# Altium PCB BSafePCB.PcbDoc
Units mil, origin at the board's own origin, x right, y up, seen from the top; angles counter-clockwise.
Board outline 3444 x 2163 mil, 2 copper layers (Top Layer, Bottom Layer); 47 components, 47 nets, 232 pads, 42 vias.
Unrouted connection lines stored in the file: 6.
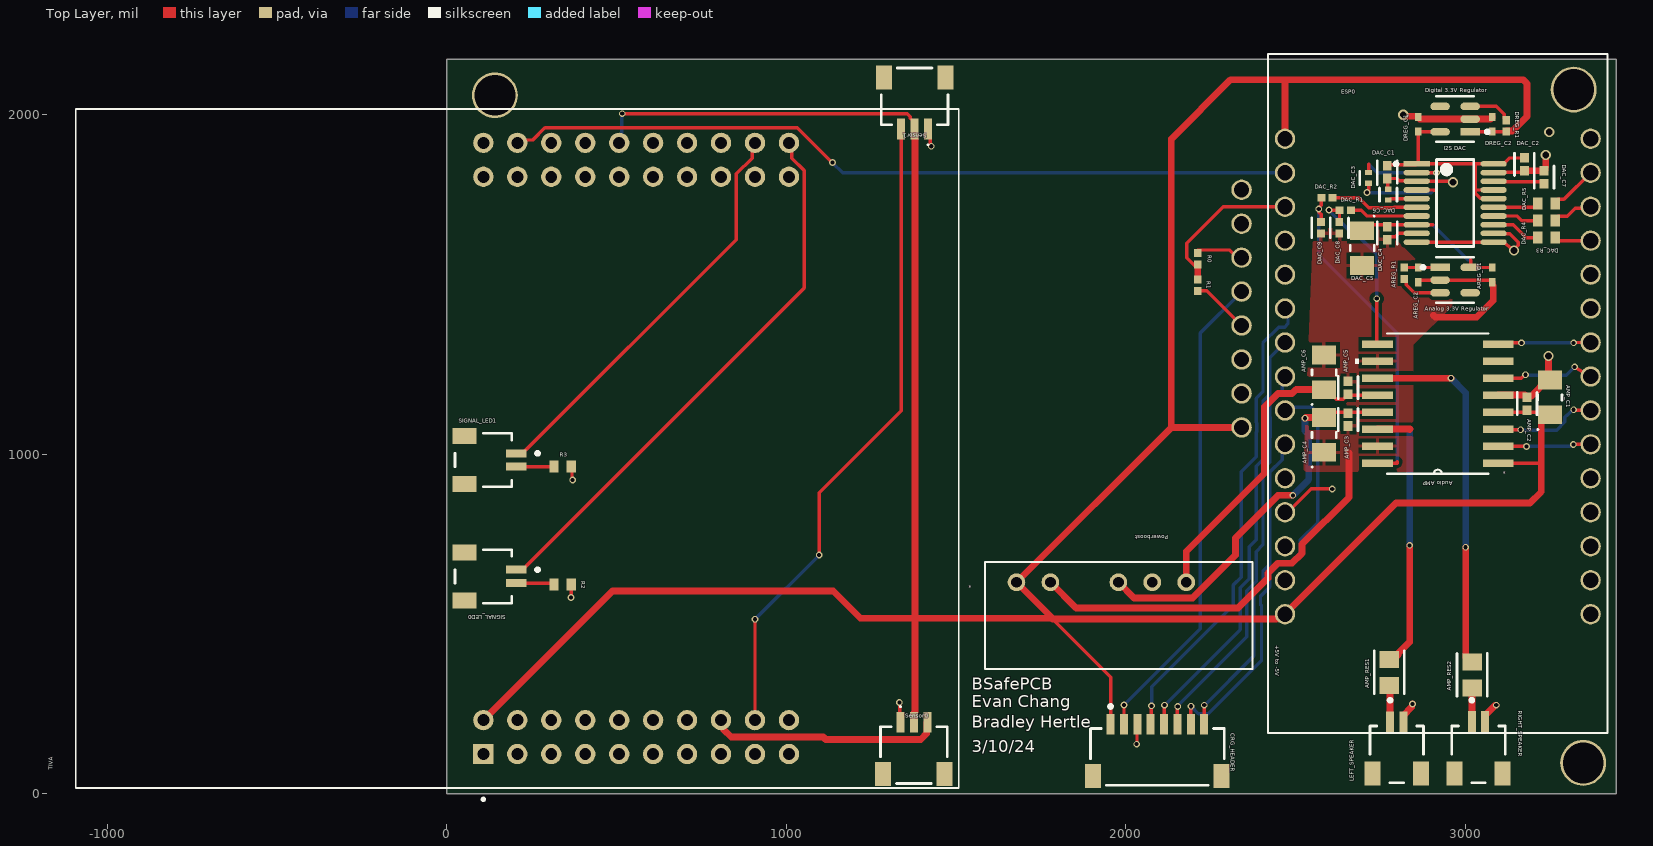
[diagram p0: Top Layer view]
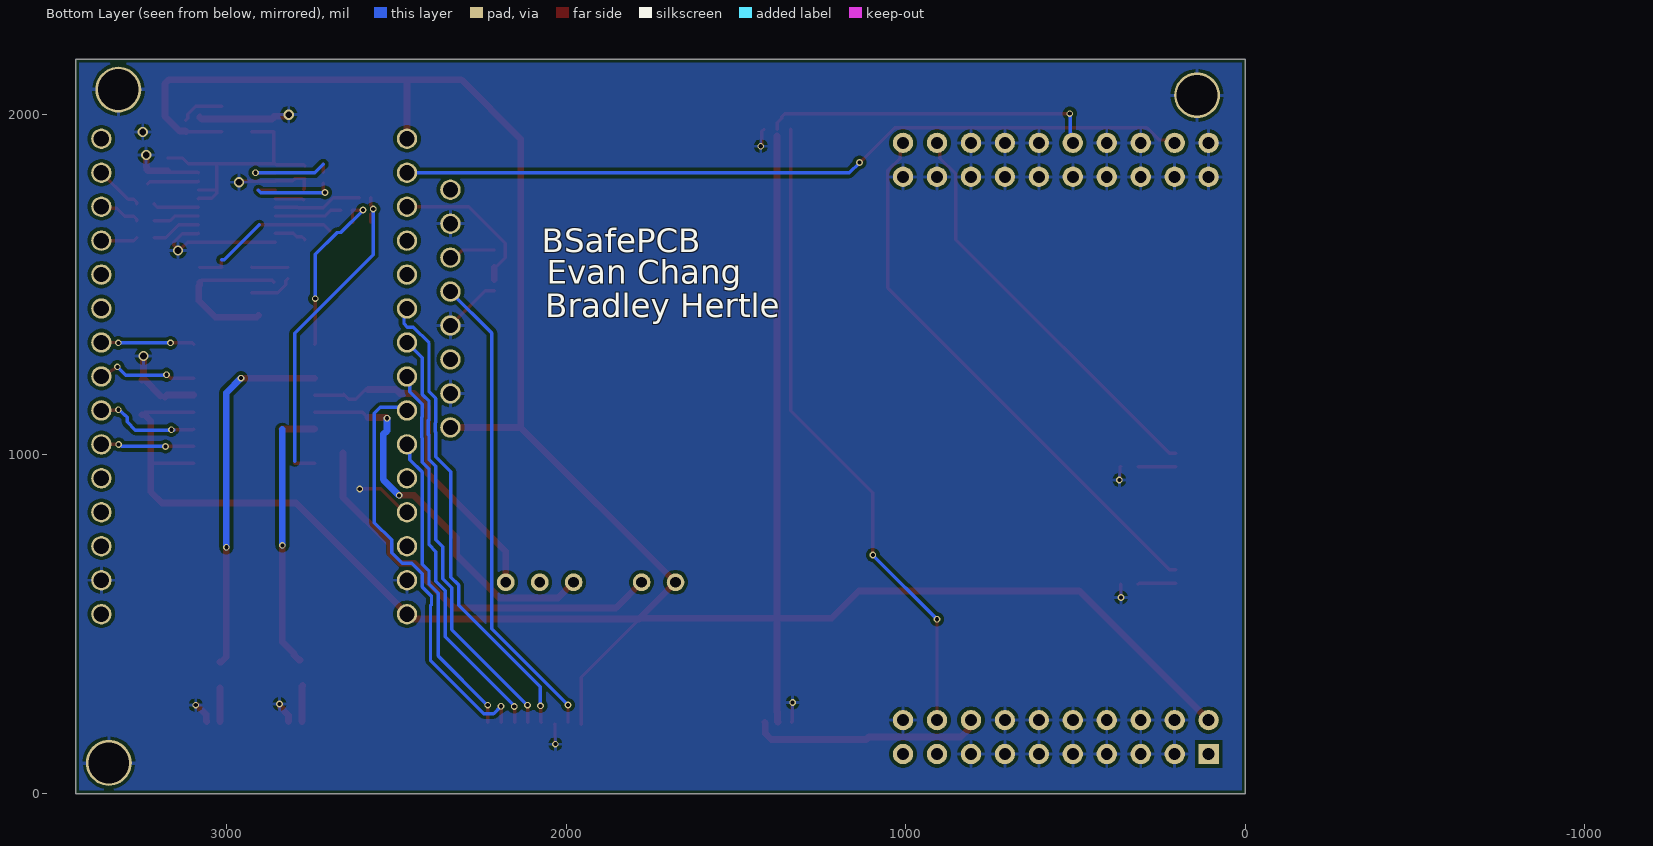
[diagram p1: Bottom Layer view, seen from below]
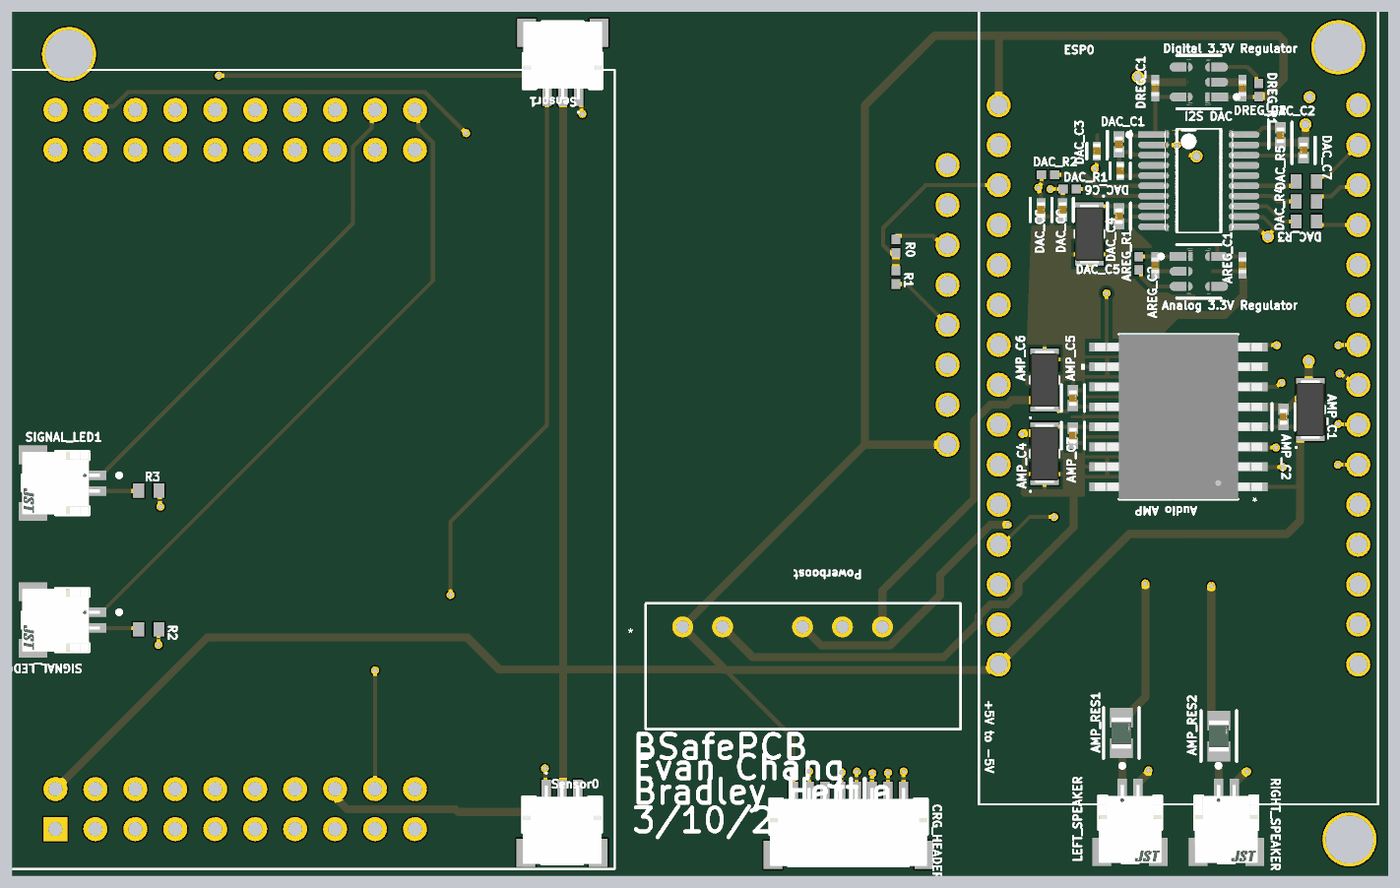
[diagram p2: 3D render of the assembled board from above, using the file's embedded part models]

## Layer stack, top to bottom
Top Solder: solder mask 0.4, Solder Resist, Dk 3.5
Top Layer: signal copper 1.4
Dielectric 1: dielectric 12.6, FR-4, Dk 4.8
Bottom Layer: signal copper 1.4
Bottom Solder: solder mask 0.4, Solder Resist, Dk 3.5

## Board outline
0,0 3444,0 3444,2163 0,2163

## Design rules (kind name [scope] priority, off if disabled: settings)
Clearance Clearance_3 [All] p1: gap=10 ignorepadtopadclearanceinfootprint=TRUE
Clearance [All] p2: gap=10 ignorepadtopadclearanceinfootprint=TRUE
PolygonConnect [All] p1: connectstyle=Relief reliefconductorwidth=10 reliefentries=4 polygonreliefangle="90 Angle" airgapwidth=10
RoutingVias [All] p1: holewidth=12 width=20 viastyle="Through Hole" minholewidth=12 minwidth=20 maxholewidth=20 maxwidth=30
SolderMaskExpansion [All] p1: expansion=4 istentingtop=FALSE
Width [All] p1: maxlimit=20 minlimit=10 preferedwidth=10
30 further rules are at their usual default settings.

## Classes and differential pairs
component class PGA: "+5V to -5V" AMP_C1 AMP_C2 AMP_C3 AMP_C4 AMP_C5 AMP_C6 AMP_RES1 AMP_RES2 "Audio AMP" LEFT_SPEAKER RIGHT_SPEAKER z
component class PCM: "Analog 3.3V Regulator" AREG_C1 AREG_C2 AREG_R1 DAC_C1 DAC_C2 DAC_C3 DAC_C4 DAC_C5 DAC_C6 DAC_C7 DAC_C8 DAC_C9 DAC_R1 DAC_R2 DAC_R3 DAC_R4 DAC_R5 "Digital 3.3V Regulator" DREG_C1 DREG_C2 DREG_R1 "I2S DAC" z
component class MAIN_SCH: CRG_HEADER ESP0 Powerboost R0 R1 R2 R3 Sensor0 Sensor1 SIGNAL_LED0 SIGNAL_LED1 TIVA z

## Components (designator, comment, footprint, x,y, rotation, side; value= is the part's Value field where it differs from the comment)
"+5V to -5V" "TMH0505D" "TMH DUAL_TRP" 1678,623 r0 top
AMP_C1 "TAJA106K016RNJ" CAPMP3217X18-T_V 3249,1167.18 r90 top locked value=10µF
AMP_C2 "CL05A104KA5NNNC" FP-CL278-IPC_A 3182,1148.84 r90 top locked value=100nF
AMP_C3 "CL05A104KA5NNNC" FP-CL278-IPC_A 2655,1102 r90 top locked value=100nF
AMP_C4 "TAJA106K016RNJ" CAPMP3217X18-T_V 2584,1056.82 r90 top locked value=10µF
AMP_C5 "CL05A104KA5NNNC" FP-CL278-IPC_A 2655,1195.84 r90 top locked value=100nF
AMP_C6 "TAJA106K016RNJ" CAPMP3217X18-T_V 2584,1241.18 r90 top locked value=10µF
AMP_RES1 "ESR10EZPJ560" FP-ESR10-IPC_A 2776,357.46 r270 top value=56
AMP_RES2 "ESR10EZPJ560" FP-ESR10-IPC_A 3020,350 r270 top value=56
"Analog 3.3V Regulator" "MIC5504-3.3YM5-TR" FP-SOT23-5LD-PL-1-IPC_B 2970,1512.87 r0 top locked
AREG_C1 "1uF 0402 Ceramic" CAP_CL05_SAM 3079,1528.11 r90 top locked value=1µF
AREG_C2 "1uF 0402 Ceramic" CAP_CL05_SAM 2861,1528.11 r90 top locked value=1µF
AREG_R1 "RC0402FR-07220KL" RESC1005X40X25NL05T10 2820,1533.14 r90 top locked
"Audio AMP" "PGA2311U" DW16 2919,1149 r180 top locked
CRG_HEADER "SM08B-SRSS-TB(LF)(SN)" JST-SM08B-SRSS-TB_V 2092.94,108.54 r0 top
DAC_C1 "CL05A104KA5NNNC" FP-CL278-IPC_A 2770,1830.87 r90 top locked value=100nF
DAC_C2 "CL05A104KA5NNNC" FP-CL278-IPC_A 3174,1853.71 r90 top locked value=100nF
DAC_C3 "GRM155R61A225KE01J" FP-GRM155-0_05-MFG 2715,1814.12 r270 top locked value=2.2µF
DAC_C4 "CL05A104KA5NNNC" FP-CL278-IPC_A 2770,1651.03 r270 top locked value=100nF
DAC_C5 "TAJA106K016RNJ" CAPMP3217X18-T_V 2696,1606.69 r270 top locked value=10µF
DAC_C6 "GRM155R61A225KE01J" FP-GRM155-0_05-MFG 2773,1764.62 r90 top locked value=2.2µF
DAC_C7 "CL05A104KA5NNNC" FP-CL278-IPC_A 3232,1815.87 r270 top locked value=100nF
DAC_C8 "CL05B222JB5NNNC" FP-CL316-IPC_B 2629,1666.87 r270 top locked value=2.2nF
DAC_C9 "CL05B222JB5NNNC" FP-CL316-IPC_B 2575,1666.87 r90 top locked value=2.2nF
DAC_R1 "RC0402FR-07470RL" RESC1005X40X25NL05T10 2646.73,1718.87 r180 top locked
DAC_R2 "RC0402FR-07470RL" RESC1005X40X25NL05T10 2592.73,1754.87 r180 top locked
DAC_R3 "RK73B1JTTD221J" RESC1608X55X30LL20T10 3239,1637.87 r180 top locked value=220
DAC_R4 "RK73B1JTTD221J" RESC1608X55X30LL20T10 3239,1687.87 r180 top locked value=220
DAC_R5 "RK73B1JTTD221J" RESC1608X55X30LL20T10 3239,1737.87 r180 top locked value=220
"Digital 3.3V Regulator" "MIC5504-3.3YM5-TR" FP-SOT23-5LD-PL-1-IPC_B 2970,1986.87 r180 top locked
DREG_C1 "1uF 0402 Ceramic" CAP_CL05_SAM 2861,1971.64 r270 top locked value=1µF
DREG_C2 "1uF 0402 Ceramic" CAP_CL05_SAM 3079,1971.64 r270 top locked value=1µF
DREG_R1 "RC0402FR-07220KL" RESC1005X40X25NL05T10 3120,1966.87 r270 top locked
ESP0 "ESP-32-BB" ESP-32-BB-Footprint-1 2469,1929 r0 top locked
"I2S DAC" "PCM5102APWR" FP-PW0020A-IPC_A 2970,1739.87 r0 top locked
LEFT_SPEAKER "SM02B-SRSS-TB(LF)(SN)" FP-SM02B-SRSS-TB_LF_SN-0 2798,116 r0 top
Powerboost "Powerboost 500c" "Powerboost 500c-Footprint-1" 2341,1779 r270 top locked
R0 "RC0402FR-07220KL" RESC1005X40X25NL05T10 2212,1576 r270 top value=220k
R1 "RC0402FR-0747KL" RESC1005X40X25NL05T10 2212,1498 r270 top value=47k
R2 "RK73B1JTTD221J" RESC1608X55X30LL20T10 341.59,617 r0 top value=220
R3 "RK73B1JTTD221J" RESC1608X55X30LL20T10 341.59,964 r0 top value=220
RIGHT_SPEAKER "SM02B-SRSS-TB(LF)(SN)" FP-SM02B-SRSS-TB_LF_SN-0 3038.87,116.1 r0 top
Sensor0 "SM03B-SRSS-TB(LF)(SN)" JST-SM03B-SRSS-TB_V 1376,114 r0 top
Sensor1 "SM03B-SRSS-TB(LF)(SN)" JST-SM03B-SRSS-TB_V 1378,2054 r180 top
SIGNAL_LED0 "SM02B-SRSS-TB(LF)(SN)" FP-SM02B-SRSS-TB_LF_SN-0 108.1,640.13 r270 top
SIGNAL_LED1 "SM02B-SRSS-TB(LF)(SN)" FP-SM02B-SRSS-TB_LF_SN-0 108.1,982.87 r270 top
TIVA "EK-TM4C123GXL" EK-TM4C123GXL-Footprint-1 108,117 r90 top locked

## Footprints (in the part's own frame and the unit in brackets; to place one, negate y for a bottom-side part, rotate by r counter-clockwise, add the part's x,y. Pads: shape width x height; smd on the part's side, far side on the other; paste and mask are expansions set on the pad)
CAP_CL05_SAM [mm]
  rect 0.606x0.5 smd paste+0 mask+0: 1(-0.553,0) 2(0.553,0)
  body extent -0.5,-0.25 0.5,0.25, height 0.55
CAPMP3217X18-T_V [mm] "Molded Capacitor, 2-Leads, Body 3.40x1.8mm"
  rect 1.4x1.8 smd: 1(-1.3,0) 2(1.3,0)
  silkscreen extent -2.45,-0.9 0.2,0.95, body extent -1.92,-0.9 1.92,0.9, height 1.8
DW16 [mil]
  rect 91x22 smd paste+0 mask+0: 1(-178,175) 2(-178,125) 3(-178,75) 4(-178,25) 5(-178,-25) 6(-178,-75) 7(-178,-125) 8(-178,-175) 9(178,-175) 10(178,-125) 11(178,-75) 12(178,-25) 13(178,25) 14(178,75) 15(178,125) 16(178,175)
  silkscreen extent -150,-207 244,207, body extent -209,-206 209,206, height 104
EK-TM4C123GXL-Footprint-1 [mm]
  rect 1.52x1.52 hole 0.89: J1_1(0,0)
  round 1.52 hole 0.89: J1_2(0,-2.54) J1_3(0,-5.08) J1_4(0,-7.62) J1_5(0,-10.16) J1_6(0,-12.7) J1_7(0,-15.24) J1_8(0,-17.78) J1_9(0,-20.32) J1_10(0,-22.86) J2_1(45.72,0) J2_2(45.72,-2.54) J2_3(45.72,-5.08) J2_4(45.72,-7.62) J2_5(45.72,-10.16) J2_6(45.72,-12.7) J2_7(45.72,-15.24) J2_8(45.72,-17.78) J2_9(45.72,-20.32) J2_10(45.72,-22.86) J3_1(2.54,0) J3_2(2.54,-2.54) J3_3(2.54,-5.08) J3_4(2.54,-7.62) J3_5(2.54,-10.16) J3_6(2.54,-12.7) J3_7(2.54,-15.24) J3_8(2.54,-17.78) J3_9(2.54,-20.32) J3_10(2.54,-22.86) J4_1(43.18,0) J4_2(43.18,-2.54) J4_3(43.18,-5.08) J4_4(43.18,-7.62) J4_5(43.18,-10.16) J4_6(43.18,-12.7) J4_7(43.18,-15.24) J4_8(43.18,-17.78) J4_9(43.18,-20.32) J4_10(43.18,-22.86)
  silkscreen extent -3.49,-35.56 48.26,30.48, body extent -5.97,-35.56 52.45,30.48, height 25.4
ESP-32-BB-Footprint-1 [mil]
  round 60 hole 45: 1(0,0) 2(0,-100) 3(0,-200) 4(0,-300) 5(0,-400) 6(0,-500) 7(0,-600) 8(0,-700) 9(0,-800) 10(0,-900) 11(0,-1000) 12(0,-1100) 13(0,-1200) 14(0,-1300) 15(0,-1400) 16(900,-1400) 17(900,-1300) 18(900,-1200) 19(900,-1100) 20(900,-1000) 21(900,-900) 22(900,-800) 23(900,-700) 24(900,-600) 25(900,-500) 26(900,-400) 27(900,-300) 28(900,-200) 29(900,-100) 30(900,0)
  silkscreen extent -50,-1750 950,250, body extent -50,-1750 950,250, height 488
FP-CL278-IPC_A [mil]
  rect 28.16x26.48 smd paste+0 mask+0: 1(-18.84,0) 2(18.84,0)
  silkscreen extent -33,-29 33,29, body extent -41,-21 41,21, height 10
FP-CL316-IPC_B [mil]
  rect 24.23x22.54 smd paste+0 mask+0: 1(-16.87,0) 2(16.87,0)
  silkscreen extent -29,-27 29,27, body extent -35,-17 35,17, height 10
FP-ESR10-IPC_A [mil]
  rect 49.53x57.56 smd paste+0 mask+0: 1(-38.46,0) 2(38.46,0)
  silkscreen extent -63,-45 63,45, body extent -83,-48 83,48, height 10
FP-GRM155-0_05-MFG [mm]
  rect 0.4x0.5 smd paste+0 mask+0: 1(-0.4,0) 2(0.4,0)
  silkscreen extent -0.5,-0.65 0.5,0.65, body extent -0.7,-0.38 0.7,0.38, height 0.25
FP-PW0020A-IPC_A [mm]
  rect 1.955x0.421 smd paste+0 mask+0: 1(-2.875,2.925)
  rrect100% 1.955x0.421 smd paste+0 mask+0: 2(-2.875,2.275) 3(-2.875,1.625) 4(-2.875,0.975) 5(-2.875,0.325) 6(-2.875,-0.325) 7(-2.875,-0.975) 8(-2.875,-1.625) 9(-2.875,-2.275) 10(-2.875,-2.925) 11(2.875,-2.925) 12(2.875,-2.275) 13(2.875,-1.625) 14(2.875,-0.975) 15(2.875,-0.325) 16(2.875,0.325) 17(2.875,0.975) 18(2.875,1.625) 19(2.875,2.275) 20(2.875,2.925)
  silkscreen extent -4.55,-3.25 1.4,3.25, body extent -4.35,-3.75 4.35,3.75, height 0.25
FP-SM02B-SRSS-TB_LF_SN-0 [mm]
  rect 0.6x1.55 smd paste+0 mask+0: 1(-0.5,2.45) 2(0.5,2.45)
  rect 1.2x1.8 smd paste+0 mask+0: 3(-1.8,-1.425) 4(1.8,-1.425)
  silkscreen extent -2,-2.13 2,4.17, body extent -2.5,-2.42 2.5,3.32, height 0.25
FP-SOT23-5LD-PL-1-IPC_B [mm]
  rect 1.456x0.57 smd paste+0 mask+0: 1(-1.125,0.95)
  rrect100% 1.456x0.57 smd paste+0 mask+0: 2(-1.125,0) 3(-1.125,-0.95) 4(1.125,-0.95) 5(1.125,0.95)
  silkscreen extent -2.53,-1.7 1.4,1.7, body extent -2.1,-1.7 2.1,1.7, height 0.25
JST-SM03B-SRSS-TB_V [mm] "SMD, 3-Leads, Body 5x4.25mm, Pitch 1mm"
  rect 0.6x1.55 smd: 1(-1,2.45) 2(0,2.45) 3(1,2.45)
  rect 1.2x1.8 smd: MP1(-2.3,-1.425) MP2(2.3,-1.425)
  silkscreen extent -2.5,-2.13 2.5,3.67, body extent -2.5,-2.12 2.5,2.83, height 3.25
JST-SM08B-SRSS-TB_V [mm] "SMD, 8-Leads, Body 10x4.25mm, Pitch 1mm"
  rect 0.6x1.55 smd: 1(-3.5,2.45) 2(-2.5,2.45) 3(-1.5,2.45) 4(-0.5,2.45) 5(0.5,2.45) 6(1.5,2.45) 7(2.5,2.45) 8(3.5,2.45)
  rect 1.2x1.8 smd: MP1(-4.8,-1.425) MP2(4.8,-1.425)
  silkscreen extent -5,-2.12 5,3.9, body extent -5,-2.12 5,2.83, height 2.96
"Powerboost 500c-Footprint-1" [mil]
  round 60 hole 45: 1(0,0) 2(100,0) 3(200,0) 4(300,0) 5(400,0) 6(500,0) 7(600,0) 8(700,0)
  body extent -400,-800 1000,50, height 550
RESC1005X40X25NL05T10 [mm] "Chip Resistor, 2-Leads, Body 1.00x0.50mm, IPC Medium Density"
  rect 0.6x0.55 smd: 1(-0.425,0) 2(0.425,0)
  body extent -0.53,-0.27 0.53,0.28, height 0.4
RESC1608X55X30LL20T10 [mm] "Chip Resistor, 2-Leads, Body 1.60x0.80mm, IPC High Density"
  rect 0.7x0.9 smd: 1(-0.65,0) 2(0.65,0)
  body extent -0.9,-0.5 0.9,0.5, height 0.55
"TMH DUAL_TRP" [mil]
  round 52 / inner round 60 / far side round 52 hole 32 paste-99999 mask+0: 1(0,0) 2(100,0) 4(300,0) 5(400,0) 6(500,0)
  silkscreen extent -92,-256 696,59, body extent -95,-260 700,60, height 400

## Part data
"+5V to -5V": library part CMP-019-00049-2, "DC-DC Regulated Power Supply Module, 2 Output, 2W, Hybrid", Max Operating Temperature=85°C, Min Operating Temperature=-40°C, RoHS Compliant=Yes
AMP_C1 AMP_C4 AMP_C6 DAC_C5: library part CMP-001-00041-7, "Standard Tantalum, 10 uF, +/- 10%, 16 V, -55 to 125 degC, 1206 (3216 Metric), RoHS, Tape and Reel", Capacitor Type=Tantalum, Case/Package=1206, Manufacturer=AVX, Max Operating Temperature=125°C, Min Operating Temperature=-55°C, Package Description="2-Pin Surface Mount Device, Body 3.2 x 1.65 mm", Package Quantity=1, Package Reference=CAPMP3217X18-T, Tolerance=10%, Voltage Rating=16V, Datasheet URL=http://datasheets.avx.com/TAJ.pdf, Datasheet Version=Feb-16, ESR=3Ohm, Manufacturer URL=http://www.avx.com/, Mounting Technology=SM, Package URL=http://www.avx.com/download/software/literature/AVX-Footprint-Library.pdf, Packaging=TapeandReel, Pins=2, RoHS Compliant=True
AMP_C2 AMP_C3 AMP_C5 DAC_C1 DAC_C2 DAC_C4 DAC_C7: library part CMP-001-00088-2, "Ceramic Capacitor, Multilayer, Ceramic, 25V, 10% +Tol, 10% -Tol, X5R, 15% TC, 0.1uF, Surface Mount, 0402, 0.1uF cap", Capacitor Type=Ceramic, Max Operating Temperature=85°C, Min Operating Temperature=-55°C, RoHS Compliant=Yes
AMP_RES1 AMP_RES2: library part CMP-009-00182-1, "Fixed Resistor, Metal Glaze/thick Film, 0.4W, 56ohm, 150V, 5% +/-Tol, 200ppm/Cel, Surface Mount, 0805", Max Operating Temperature=155°C, Min Operating Temperature=-55°C, Tolerance=5%, RoHS Compliant=Yes
"Analog 3.3V Regulator" "Digital 3.3V Regulator": library part CMP-019-00050-1, "Fixed Positive LDO Regulator, 3.3V, 0.38V Dropout, CMOS, PDSO5, use this one", RoHS Compliant=Yes
AREG_C1 AREG_C2 DREG_C1 DREG_C2: library part CMP-001-00089-6, "CL05A105KO5NNNC, Samsung, Ceramic CAP", Mfr_Name=Samsung, Design Item ID=CL05A105KO5NNNC, Source=CL05A105KO5NNNC.SchLib
AREG_R1 DREG_R1: library part CMP-009-00179-1, "Fixed Resistor, Metal Glaze/thick Film, 0.0625W, 220000ohm, 50V, 1% +/-Tol, 100ppm/Cel, Surface Mount, 0402", Max Operating Temperature=155°C, Min Operating Temperature=-55°C, Tolerance=1%, RoHS Compliant=Yes
"Audio AMP": library part CMP-005-000000-2, "No Description Available", Mfr_Name="Texas Instruments", Design Item ID=PGA2311U, RefDes=RefDes, Source=PGA2311U.SchLib, Type=Type
CRG_HEADER: library part CMP-002-00073-1, "Connector Header, Side Entry, SR Series, 8 Position, 1.00mm, 50V, Surface Mount, Tin, Natural"
DAC_C3 DAC_C6: library part CMP-001-00090-1, "Ceramic Capacitor, Multilayer, Ceramic, 10V, 10% +Tol, 10% -Tol, X5R, 15% TC, 2.2uF, Surface Mount, 0402"
DAC_C8 DAC_C9: library part CMP-001-00087-2, "Ceramic Capacitor, Multilayer, Ceramic, 50V, 5% +Tol, 5% -Tol, X7R, 15% TC, 0.0022uF, Surface Mount, 0402, 2.2nF cap", Capacitor Type=Ceramic, Max Operating Temperature=125°C, Min Operating Temperature=-55°C, RoHS Compliant=Yes
DAC_R1 DAC_R2: library part CMP-009-00181-1, "Fixed Resistor, Metal Glaze/thick Film, 0.0625W, 470ohm, 50V, 1% +/-Tol, 100ppm/Cel, Surface Mount, 0402", Max Operating Temperature=155°C, Min Operating Temperature=-55°C, Tolerance=1%, RoHS Compliant=Yes
DAC_R3 DAC_R4 DAC_R5 R2 R3: library part CMP-009-00180-2, "Fixed Resistor, Metal Glaze/thick Film, 0.125W, 220ohm, 75V, 5% +/-Tol, 200ppm/Cel, Surface Mount, 0603", Max Operating Temperature=155°C, Min Operating Temperature=-55°C, Tolerance=5%, RoHS Compliant=Yes
ESP0: library part CMP-00001-11, "Breakoutboard for ESP-32-BB"
"I2S DAC": library part CMP-00027-00004-1, "D/A Converter, 1 Func, Serial Input Loading, PDSO20", Max Operating Temperature=85°C, Min Operating Temperature=-25°C, RoHS Compliant=Yes
LEFT_SPEAKER RIGHT_SPEAKER SIGNAL_LED0 SIGNAL_LED1: library part CMP-002-00072-1, "CONN HEADER SH 2POS SIDE 1MM TIN", Pins=2
Powerboost: library part CMP-00002-5, "Breakout board component for Adafruit Powerboost 500c"
R0: library part CMP-009-00179-2, "Fixed Resistor, Metal Glaze/thick Film, 0.0625W, 220000ohm, 50V, 1% +/-Tol, 100ppm/Cel, Surface Mount, 0402", Max Operating Temperature=155°C, Min Operating Temperature=-55°C, Tolerance=1%, RoHS Compliant=Yes
R1: library part CMP-009-00178-2, "Fixed Resistor, Metal Glaze/thick Film, 0.0625W, 47000ohm, 50V, 1% +/-Tol, 100ppm/Cel, Surface Mount, 0402", Max Operating Temperature=155°C, Min Operating Temperature=-55°C, Tolerance=1%, RoHS Compliant=Yes
Sensor0 Sensor1: library part CMP-002-00074-1, "CONN HEADER SH 3POS SIDE 1MM TIN", Pins=3
TIVA: library part CMP-012-000000-3, "ARMÂ® CortexÂ®-M4F Based MCU TM4C123G LaunchPadâ„¢ Evaluation Kit", Package=None, Availability=Warning, Check_prices=https://www.snapeda.com/parts/EK-TM4C123GXL/Texas%20Instruments/view-part/132968/?ref=eda, Component Type=Standard, Design Item ID=EK-TM4C123GXL, MF="Texas Instruments", MP=EK-TM4C123GXL, Pin Count=40, Price=None, Purchase-URL=https://pricing.snapeda.com/search/part/EK-TM4C123GXL/?ref=eda, SnapEDA_Link=https://www.snapeda.com/parts/EK-TM4C123GXL/Texas%20Instruments/view-part/132968/?ref=snap, Source=EK-TM4C123GXL.SchLib

## Free pads (board coordinates)
  round 135 hole 120: 3(3347,91) 4(3319,2074) 5(142,2057)

## Via types
v1: diameter 20, hole 12, Top Layer to Bottom Layer, 36 vias
v2: diameter 30, hole 20, Top Layer to Bottom Layer, 6 vias

## Nets (pads, with @x,y where several pads share a name; then routed paths per layer and width w, separated by ;. In a path a pad name is that pad's centre, name@x,y a point inside that pad or via, vN(x,y) a via of type N, cw(c..) or ccw(c..) an arc to the next point about the centre after c; other vN are vias at no path point)
5V: "+5V to -5V.1" "Audio AMP.1" "Audio AMP.4" "Digital 3.3V Regulator.1" AMP_C1.1 AMP_C2.1 CRG_HEADER.1 DREG_C2.2 DREG_R1.2 ESP0.1 ESP0.15 Powerboost.8 Sensor0.2 Sensor1.2 TIVA.J2_5 TIVA.J3_1 | length 10510.4
  Top Layer w10: v1(517,2003) 517.06,2003.06 1356.65,2003.06 1365.44,1994.27 1365.44,1988.8 1378,1976.24 Sensor1.2 ; 1784,515 1955.15,343.85 CRG_HEADER.1 ; 3014.3,1949.47 3014.64,1949.81 3119.67,1949.81 DREG_R1.2 ; 3097,974 3223.57,974 ; 3097,1124 3241,1124 AMP_C1.1
  Top Layer w20: TIVA.J3_1 488,597 1138.5,597 1218.5,517 1379,517 ; Sensor0.2 1377.81,212.27 1377.81,240.45 1379,241.64 1379,517 ; 1379,658 1379,517 ; 1379,660 Sensor1.2@1379,1938 ; 1784,515 2444.18,515 2458.18,529 ESP0.15 2796,856 3190.28,856 3223.57,889.28 3223.57,974 3223.57,1098.44 3241.13,1116 AMP_C1.1 ; Powerboost.8 2134,1079 ; ESP0.1 2469,2102 2470,2103 ; DREG_R1.2 3120,1950.97 3120.83,1951.79 3139.11,1951.79 3182,1994.68 3182,2091.28 3170.28,2103 2470,2103 ; 1379,517 1784,517 1678,623 2134,1079 ; 2134,1079 2134,1928 2309,2103 2470,2103
  Bottom Layer w10: TIVA.J2_5 515.09,1924.09 515.09,2001.09 v1(517,2003)
A3.3V: "Analog 3.3V Regulator.5" "I2S DAC.8" AREG_C1.2 DAC_C4.1 DAC_C5.1 | length 457.9
  Top Layer w10: DAC_C5.1 2714.02,1675.9 2856.8,1675.9 2857.24,1675.45 2904.55,1675.45 ; 3014.3,1550.27 3014.5,1550.07 ; 3015.04,1572.96 3016,1572 3016,1551.57 3014.5,1550.07 ; AREG_C1.2 3078.8,1550.07 3014.5,1550.07
  Bottom Layer w10: 2904.55,1675.45 3007.04,1572.96 3015.04,1572.96
A+5: "Analog 3.3V Regulator.1" AREG_C2.2 AREG_R1.2 | length 105.9
  Top Layer w10: AREG_R1.2 2820.2,1550.07 2861,1550.07 2925.5,1550.07 2925.7,1550.27
A+5V: "+5V to -5V.6" "Audio AMP.12" AMP_C5.1 AMP_C6.1 | length 986.4
  Top Layer w10: AMP_C6.1 2591.87,1190 2619.74,1162.13 2640.13,1162.13 2645.92,1167.92 2646.76,1167.92 AMP_C5.1@2655,1176.16 ; AMP_C5.1 AMP_C5.1@2655,1176.16 ; 2741,1174 2655,1174 AMP_C5.1@2655,1176.16
  Top Layer w20: 2178,623 2178,714 2408,944 2408,1138.71 2448.29,1179 2489.71,1179 2501.71,1191 2583,1191 AMP_C6.1
A-5V: "+5V to -5V.4" "Audio AMP.13" AMP_C3.2 AMP_C4.2 | length 1159.3
  Top Layer w10: AMP_C4.2 2600,1124 2741,1124
  Top Layer w20: 1978,623 2024,577 2197.05,577 2322.67,702.62 2322.67,753.38 2448.29,879 v1(2491.91,879) ; v1(2528,1106) 2530,1108 AMP_C4.2
  Bottom Layer w20: v1(2491.91,879) 2539,926.09 2539,1057.99 2528,1068.99 v1(2528,1106)
AGND: "+5V to -5V.2" "Analog 3.3V Regulator.2" "Audio AMP.10" "Audio AMP.15" "I2S DAC.9" AMP_C3.1 AMP_C4.1 AMP_C5.2 AMP_C6.2 AREG_C1.1 AREG_C2.1 DAC_C4.2 DAC_C5.2 DAC_C8.2 DAC_C9.1 | length 1774.7
  Top Layer w10: DAC_C4.2 2770,1632.55 2778.24,1640.79 2793.79,1640.79 2803.3,1650.31 2856.8,1650.31 ; AREG_C2.1 2861,1508.03 2865.84,1512.87 2925.7,1512.87 AREG_C1.1@3074.16,1512.87
  Top Layer w20: 1778,623 1854,547 2331,547 2419,635 2419,649.71 2448.29,679 2489.71,679 2519,708.29 2519,735 2657,873 2657,1004 ; 2906,1409 2911.42,1403.58 3033.58,1403.58 3082,1452 3082,1495.5 3079.16,1498.34 3079.16,1506.19 AREG_C1.1
  Bottom Layer w20: 1778,623 1784.12,629.12
AMP_CS: "Audio AMP.2" ESP0.21 | length 274.9
  Top Layer w10: 3097,1024 3097.5,1023.5 3179.5,1023.5 v1(3180,1023) ; v1(3318,1029) ESP0.21
  Bottom Layer w10: v1(3180,1023) 3309.29,1023 3315.29,1029 v1(3318,1029)
AMP_DATA: "Audio AMP.3" ESP0.22 | length 307.1
  Top Layer w10: 3097,1074 3099.04,1071.96 v1@3155.04,1071.96 ; v1(3319.04,1131) 3320.04,1130 3368,1130 ESP0.22
  Bottom Layer w10: v1@3155.04,1071.96 3156,1071 3163,1071 3269,1071 3293.04,1095.04 3293.04,1109.04 3298.94,1114.94 3300.28,1114.94 3316.33,1131 v1(3319.04,1131)
  other v1: 3163,1072
AMP_IN_L: "Audio AMP.16" DAC_C9.2 DAC_R2.2 | length 981.5
  Top Layer w10: v1(2568.38,1722.36) 2570.29,1720.45 2570.29,1711.54 2575.5,1706.33 2575.5,1684.25 DAC_C9.2 ; v1@2573,1721 2570.29,1723.71 2570.29,1726.98 2576,1732.69 DAC_R2.2 ; 2741,974 2799,974 2800,978.54
  Bottom Layer w10: v1(2568.38,1722.36) 2568.38,1587.61 2800,1355.99 2800,978.54
AMP_IN_R: "Audio AMP.9" DAC_C8.1 DAC_R1.2 | length 527.9
  Top Layer w10: v1(2598.19,1719) 2598.25,1718.94 2629.94,1718.94 DAC_R1.2 2629.5,1718.37 2629.5,1684.25 DAC_C8.1 ; v1(2739,1458) 2739,1326 2741,1324
  Bottom Layer w10: v1(2598.19,1719) 2664.15,1653.04 2674.96,1653.04 2739,1589 v1(2739,1458)
AMP_MUTE: "Audio AMP.8" ESP0.24 | length 272.1
  Top Layer w10: 3097,1324 3101.04,1328.04 v1@3160.04,1328.04 ; v1(3319.01,1328) 3320.01,1329 ESP0.24
  Bottom Layer w10: v1@3162,1328 v1(3319.01,1328)
  other v1: 3165,1328
AMP_OUT_L: "Audio AMP.14" AMP_RES1.1 | length 800.8
  Top Layer w20: 2741,1074 2837,1074 2836,1073 ; AMP_RES1.1@2783,393.93 2787.02,393.93 2801.78,408.7 2801.78,412.71 2836,446.93 v1(2836,731.7)
  Bottom Layer w20: v1(2836,731.7) 2836,1073
AMP_OUT_R: "Audio AMP.11" AMP_RES2.1 | length 1080.6
  Top Layer w20: 2741,1224 v1(2958,1224) ; v1(3001,726) 3001,407.46 3001.22,407.25 3001.22,403.23 3015.98,388.46 AMP_RES2.1
  Bottom Layer w20: v1(2958,1224) 3001,1181 v1(3001,726)
AMP_SCK: "Audio AMP.6" ESP0.23 | length 294.5
  Top Layer w10: 3097,1224 3164.29,1224 3174.29,1234 v1(3177,1234) ; v1(3322.05,1257.32) ESP0.23
  Bottom Layer w10: v1(3177,1234) 3178,1233 3297.72,1233 v1(3322.05,1257.32)
BAT: Powerboost.3 R0.1 | length 138.4
  Top Layer w10: R0.1@2212,1601.59 2304.88,1601.59 2327.47,1579 Powerboost.3
CRASH: ESP0.2 TIVA.J2_2 | length 2335.1
  Top Layer w10: TIVA.J2_2 216.45,1925.45 252.92,1925.45 289.39,1961.92 1033.08,1961.92 v1(1136,1859)
  Bottom Layer w10: v1(1136,1859) 1166.5,1828.5 2468.5,1828.5 ESP0.2
CRG0: CRG_HEADER.7 ESP0.9 | length 1250.7
  Top Layer w10: CRG_HEADER.7@2191.45,210.56 2191.72,210.83 v1@2191.72,257.72
  Bottom Layer w10: v1@2191.72,257.72 2192,258 2214,236 2242.36,236 2399.78,393.43 2399.78,553.79 2396.71,556.86 2396.71,581.71 2424,609 2424,647.64 2455.36,679 2482.64,679 2514,710.36 2514,747.64 2565,798.64 2565,1120.43 2547.43,1138 2478,1138 ESP0.9
  other v1: 2191.86,257.86
CRG1: CRG_HEADER.6 ESP0.8 | length 1151.4
  Top Layer w10: v1@2152.04,257.96 2152.04,210.6 CRG_HEADER.6@2152.08,210.56
  Bottom Layer w10: v1@2152.04,257.96 2152,258 2356.71,462.71 2356.71,598.28 2384,625.57 2384,712.96 2404,732.96 2404,955.92 2424,975.92 2424,1047.64 2426,1049.64 2426,1108.36 2424,1110.36 2424,1147.64 2460.36,1184 2460.36,1220.36 ESP0.8
  other v1: 2153,257
CRG2: CRG_HEADER.5 ESP0.7 | length 1267.7
  Top Layer w10: CRG_HEADER.5@2112.71,210.56 2112.85,210.7 v1@2112.85,259.85
  Bottom Layer w10: v1@2112.85,259.85 2336.71,483.71 2336.71,606.57 2364,633.85 2364,727.6 2384,747.6 2384,964.21 2404,984.21 2404,1055.92 2406,1057.92 2406,1100.08 2404,1102.08 2404,1155.92 2424,1175.92 2424,1284 ESP0.7
  other v1: 2114,261
CRG3: CRG_HEADER.4 ESP0.6 | length 1401.3
  Top Layer w10: CRG_HEADER.4@2073.34,210.56 2074.67,211.89 v1@2074.67,257.67
  Bottom Layer w10: v1@2074.67,257.67 v1(2076,259) 2076,314.72 2316.71,555.43 2316.71,614.85 2339.78,637.92 2339.78,948.07 2364,972.28 2364,972.49 2384,992.49 2384,1064.21 2386,1066.21 2386,1091.79 2384,1093.79 2384,1164.21 2404,1184.21 2404,1327.64 2450.36,1374 2467.64,1374 2477.64,1384 2477.64,1420.36 ESP0.6
CRG_BUTT: CRG_HEADER.8 ESP0.10 | length 918.9
  Top Layer w10: CRG_HEADER.8@2230.82,210.56 v1@2230.82,260.18
  Bottom Layer w10: v1@2230.82,260.18 2230,261 2232,261 2376.71,405.71 2376.71,590 2404,617.28 2404,655.92 2424,675.92 2424,947.64 2460.36,984 2460.36,1020.36 ESP0.10
  other v1: 2231,261
CRG_SWITCH: CRG_HEADER.2 Powerboost.4 | length 1411.9
  Top Layer w10: CRG_HEADER.2@1994.6,210.56 1994.8,210.76 v1(1994.8,261.8)
  Bottom Layer w10: v1(1994.8,261.8) 2219,486 2219,1357 Powerboost.4
D3.3V: "Digital 3.3V Regulator.5" "I2S DAC.1" "I2S DAC.16" "I2S DAC.17" "I2S DAC.20" DAC_C1.2 DAC_C2.2 DREG_C1.2 | length 774.6
  Top Layer w10: DAC_C1.2 2773.01,1852.72 2854.49,1852.72 2856.8,1855.03 2857.72,1855.03 ; 2925.7,1949.47 2925.5,1949.67 2861.2,1949.67 DREG_C1.2 2861,1858.31 2857.72,1855.03 ; 3083.2,1752.67 3081.95,1753.92 3044.4,1753.92 3029.71,1768.61 3029.71,1778 ; 3083.2,1778.26 3029.97,1778.26 3029.71,1778 ; DAC_C2.2 3130.94,1872.55 3113.41,1855.03 3083.2,1855.03 3029.71,1855.03 ; 2857.72,1855.03 3029.71,1855.03 ; 3029.71,1778 3029.71,1855.03
GND: "Audio AMP.5" "Digital 3.3V Regulator.2" "I2S DAC.3" "I2S DAC.10" "I2S DAC.11" "I2S DAC.12" "I2S DAC.19" AMP_C1.2 AMP_C2.2 CRG_HEADER.3 DAC_C1.1 DAC_C2.1 DAC_C6.2 DAC_C7.1 DREG_C1.1 DREG_C2.1 ESP0.12 ESP0.14 ESP0.17 LEFT_SPEAKER.2 pad.3 pad.4 pad.5 Powerboost.2 Powerboost.5 Powerboost.7 R1.2 R2.2 R3.2 RIGHT_SPEAKER.2 Sensor0.1 Sensor1.1 TIVA.J1_2 TIVA.J1_3 TIVA.J1_4 TIVA.J1_5 TIVA.J1_6 TIVA.J1_7 TIVA.J1_8 TIVA.J2_1 TIVA.J2_3 TIVA.J2_4 TIVA.J2_6 TIVA.J2_7 TIVA.J2_8 TIVA.J3_2 TIVA.J3_3 TIVA.J3_4 TIVA.J3_5 TIVA.J3_6 TIVA.J3_7 TIVA.J3_10 TIVA.J4_1 TIVA.J4_2 TIVA.J4_3 TIVA.J4_4 TIVA.J4_5 TIVA.J4_6 TIVA.J4_7 TIVA.J4_8 TIVA.J4_9 TIVA.J4_10 | length 2061.7
  Top Layer w10: v1(366,578) 366.59,578.59 366.59,616.41 R2.2 ; R3.2 369.09,962.09 369.09,925.91 v1(371,924) ; v1(1333,269) 1334.82,267.18 1334.82,212.27 Sensor0.1 ; Sensor1.1 1424.18,1950.73 1424.18,1912.56 1427,1909.74 v1(1427,1907.03) ; v1(2032,146) 2032.95,146.94 2032.95,204.06 CRG_HEADER.3 ; R1.2 2238.73,1481.27 Powerboost.5 ; ESP0.12 2477.27,829 2546.27,898 v1(2608,898) ; DAC_C6.2 2771.5,1781.87 2771.5,1810.53 DAC_C1.1 2798.24,1812.03 2805.17,1805.1 2855.54,1805.1 2856.8,1803.85 2960.85,1803.85 v2@2962,1805 ; 2856.8,1624.72 3083.2,1624.72 3114.85,1624.72 v2@3134.58,1604.99 ; 3083.2,1650.31 3084.46,1649.05 3130.95,1649.05 3155.86,1624.14 3155.86,1615.86 3143,1603 v2(3143,1600) 3143,1603.41 v2@3138,1608.41 ; 3083.2,1829.44 3084.46,1830.7 3169.57,1830.7 DAC_C2.1@3173.87,1835
  Top Layer w20: v2(2817,2000) 2819.71,2000 2824.38,1995.32 2860.84,1995.32 2861,1995.16 DREG_C1.1 2861,1991.72 2865.84,1986.87 3014.3,1986.87 3074.24,1986.87 3079,1991.64 DREG_C2.1 ; LEFT_SPEAKER.2 2817.69,231.16 2842.09,255.56 v1(2844,264) ; v2@2962,1805 2962,1803 v2(2964,1801) ; RIGHT_SPEAKER.2 3060.36,214.37 3060.36,233.07 3088.29,261 v1(3091,261) ; 3097,1174 3175.68,1174 3177.92,1171.76 3178.76,1171.76 3182,1168.53 AMP_C2.2 ; DAC_C2.1@3173.87,1835 DAC_C2.1 3174.08,1834.79 3231.92,1834.79 DAC_C7.1 3235.24,1837.95 3235.24,1845.27 3237,1847.03 v2(3237,1881) ; AMP_C2.2@3194.53,1171.76 AMP_C1.2@3241.13,1218.36 ; v2(3245,1289) 3245,1222.36 AMP_C1.2
  other v2: 3247,1949
I2S_CLK: DAC_R3.1 ESP0.27 | length 108.1
  Top Layer w10: DAC_R3.1 3264.59,1637.78 3273.37,1629 ESP0.27
I2S_DATA: DAC_R4.1 ESP0.28 | length 123.8
  Top Layer w10: DAC_R4.1 3264.59,1691.81 3273.37,1700.59 3300.21,1700.59 3324,1724.37 3364.37,1724.37 ESP0.28
I2S_WS: DAC_R5.1 ESP0.29 | length 144.5
  Top Layer w10: DAC_R5.1 3264.59,1741.81 3273.37,1750.59 3290.59,1750.59 ESP0.29
LED0: SIGNAL_LED0.1 TIVA.J2_10 | length 1638.1
  Top Layer w10: SIGNAL_LED0.1 223.26,659.82 1052.92,1489.48 1052.92,1835.61 1016.45,1872.08 1016.45,1908.55 TIVA.J2_10
LED1: SIGNAL_LED1.1 TIVA.J2_9 | length 1216.8
  Top Layer w10: SIGNAL_LED1.1 223.26,1002.55 852.92,1632.21 852.92,1825.45 899.55,1872.08 899.55,1908.55 TIVA.J2_9
"NetAnalog 3.3V Regulator_3": "Analog 3.3V Regulator.3" AREG_R1.1 | length 129.7
  Top Layer w10: AREG_R1.1 2825.83,1510.58 2825.83,1498.54 2848.9,1475.47 2925.7,1475.47
NetDAC_C3_1: "I2S DAC.2" DAC_C3.1 | length 292.9
  Top Layer w10: DAC_C3.1 2715.5,1830.37 2715.5,1853.5 ; 2856.8,1829.44 2857.02,1829.22 2914.96,1829.22 v1(2915.28,1828.9)
  Bottom Layer w10: 2715.5,1853.5 2716,1854 2741,1829 2915.18,1829 v1(2915.28,1828.9)
NetDAC_C3_2: "I2S DAC.4" DAC_C3.2 | length 282.4
  Top Layer w10: v1(2710,1770.5) 2710,1773.21 2715,1778.21 DAC_C3.2 ; 2856.8,1778.26 2856.93,1778.13 2907.87,1778.13 2908,1778 2906.65,1778
  Bottom Layer w10: v1(2710,1770.5) 2899.15,1770.5 2906.65,1778
NetDAC_C6_1: "I2S DAC.5" DAC_C6.1 | length 85.4
  Top Layer w10: DAC_C6.1 2774.97,1748.87 2778.76,1752.67 2856.8,1752.67
NetDAC_C7_2: "I2S DAC.18" DAC_C7.2 | length 151.6
  Top Layer w10: 3083.2,1803.85 3084.46,1802.59 3226.44,1802.59 DAC_C7.2
NetDAC_R1_1: "I2S DAC.7" DAC_R1.1 | length 200.5
  Top Layer w10: DAC_R1.1 2693.84,1718.87 2711.23,1701.49 2856.8,1701.49
NetDAC_R2_1: "I2S DAC.6" DAC_R2.1 | length 259.7
  Top Layer w10: DAC_R2.1 2686.13,1754.87 2715,1726 2789.06,1726 2790.13,1727.08 2856.8,1727.08
NetDAC_R3_2: "I2S DAC.13" DAC_R3.2 | length 146
  Top Layer w10: 3083.2,1675.9 3140.9,1675.9 3178.92,1637.87 DAC_R3.2
NetDAC_R4_2: "I2S DAC.14" DAC_R4.2 | length 135.8
  Top Layer w10: 3083.2,1701.49 3153.1,1701.49 3166.72,1687.87 DAC_R4.2
NetDAC_R5_2: "I2S DAC.15" DAC_R5.2 | length 135.9
  Top Layer w10: 3083.2,1727.08 3204.63,1727.08 3213.41,1735.86 DAC_R5.2
"NetDigital 3.3V Regulator_3": "Digital 3.3V Regulator.3" DREG_R1.1 | length 129.4
  Top Layer w10: 3014.3,2024.27 3091.1,2024.27 3114.17,2001.2 3114.17,1989.43 DREG_R1.1
NetR2_1: R2.1 SIGNAL_LED0.2 | length 112.9
  Top Layer w10: SIGNAL_LED0.2 312.55,620.45 R2.1
NetR3_1: R3.1 SIGNAL_LED1.2 | length 111.8
  Top Layer w10: SIGNAL_LED1.2 315.18,963.18 R3.1
SPEAKER_L: AMP_RES1.2 LEFT_SPEAKER.1 | length 107.5
  Top Layer w20: AMP_RES1.2 2778.32,316.69 LEFT_SPEAKER.1
SPEAKER_R: AMP_RES2.2 RIGHT_SPEAKER.1 | length 99.3
  Top Layer w20: RIGHT_SPEAKER.1 3019.59,212.97 3019.59,311.13 AMP_RES2.2
VBAT: ESP0.3 R0.2 R1.1 | length 456.9
  Top Layer w10: R0.2@2212,1550.41 2208.06,1550.41 2179.28,1579.19 2179.28,1621.58 2286.7,1729 ESP0.3
  Top Layer w20: R1.1 R0.2@2212,1550.41
VDistance0: Sensor0.3 TIVA.J3_8 | length 681.9
  Top Layer w20: TIVA.J3_8 815.62,209.38 815.62,189.38 838.08,166.92 1109.3,166.92 1116.28,159.94 1396.09,159.94 1413.56,177.41 1413.56,208.64 Sensor0.3
VDistance1: Sensor1.3 TIVA.J3_9 | length 1918.9
  Top Layer w10: TIVA.J3_9 v1(908,514) ; v1(1097,703) 1097,886 1338.63,1127.63 Sensor1.3
  Bottom Layer w10: v1(908,514) v1(1097,703)
pads on no net: "+5V to -5V.5" "Analog 3.3V Regulator.4" "Audio AMP.7" "Digital 3.3V Regulator.4" CRG_HEADER.MP1 CRG_HEADER.MP2 ESP0.4 ESP0.5 ESP0.11 ESP0.13 ESP0.16 ESP0.18 ESP0.19 ESP0.20 ESP0.25 ESP0.26 ESP0.30 LEFT_SPEAKER.3 LEFT_SPEAKER.4 Powerboost.1 Powerboost.6 RIGHT_SPEAKER.3 RIGHT_SPEAKER.4 Sensor0.MP1 Sensor0.MP2 Sensor1.MP1 Sensor1.MP2 SIGNAL_LED0.3 SIGNAL_LED0.4 SIGNAL_LED1.3 SIGNAL_LED1.4 TIVA.J1_1 TIVA.J1_9 TIVA.J1_10

## Polygon pours and split planes (outlines as drawn)
AGND on Top Layer "NONET_L-01_P-001" (solid, remove dead copper, pour order 11): 2552,1666 2553,1665 2764,1665 2861,1568 2961,1568 2961,1436 2847,1322 2847,949 2530,949 2524,955
GND on Bottom Layer "GND_L02_P010" (solid, remove dead copper, pour order 10): 10,10 3434,10 3434,2153 10,2153

## Silkscreen, mask and mechanical layers (free items; w line width, h text height)
Top Overlay:
  text "BSafePCB" at 1547,294.64 h60
  text "Evan Chang" at 1547,243.25 h60
  text "Bradley Hertle" at 1547,182.25 h60
  text "3/10/24" at 1546,110.69 h60
Bottom Overlay:
  text "BSafePCB" at 2072,1571.28 h120
  text "Evan Chang" at 2058,1478.53 h120
  text "Bradley Hertle" at 2062,1379.53 h120

## Text inside footprints (layer, text, board x,y; h text height)
"+5V to -5V": Top Overlay "*" at 1538.05,598 h20; Mechanical 13 "*" at 1588.05,598 h20
"Audio AMP": Top Overlay "*" at 3119.5,957 h20 r180; Mechanical 13 "*" at 3119.5,957 h20 r180